# Altium PCB gitarukuran dah bener jadi.PCBDOC
Units mil, origin at the board's own origin, x right, y up, seen from the top; angles counter-clockwise.
Board outline 9670 x 5425 mil, 2 copper layers (Top Layer, Bottom Layer); 62 components, 44 nets, 204 pads, 0 vias.
Unrouted connection lines stored in the file: 147.
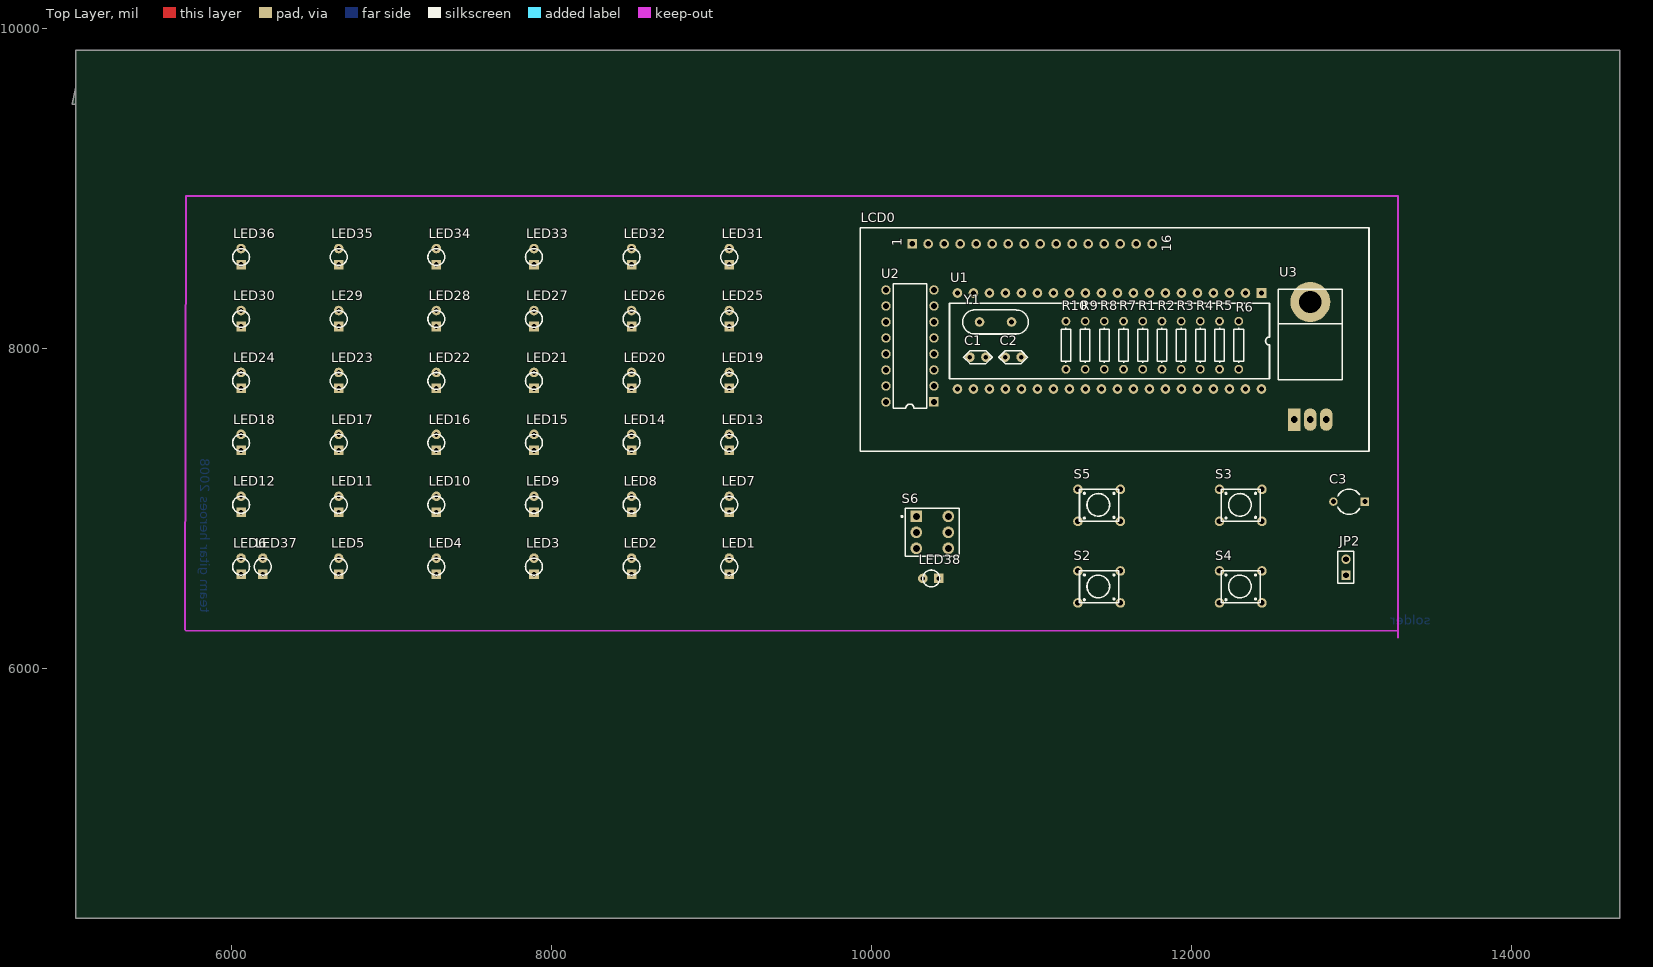
[diagram p0: Top Layer view]
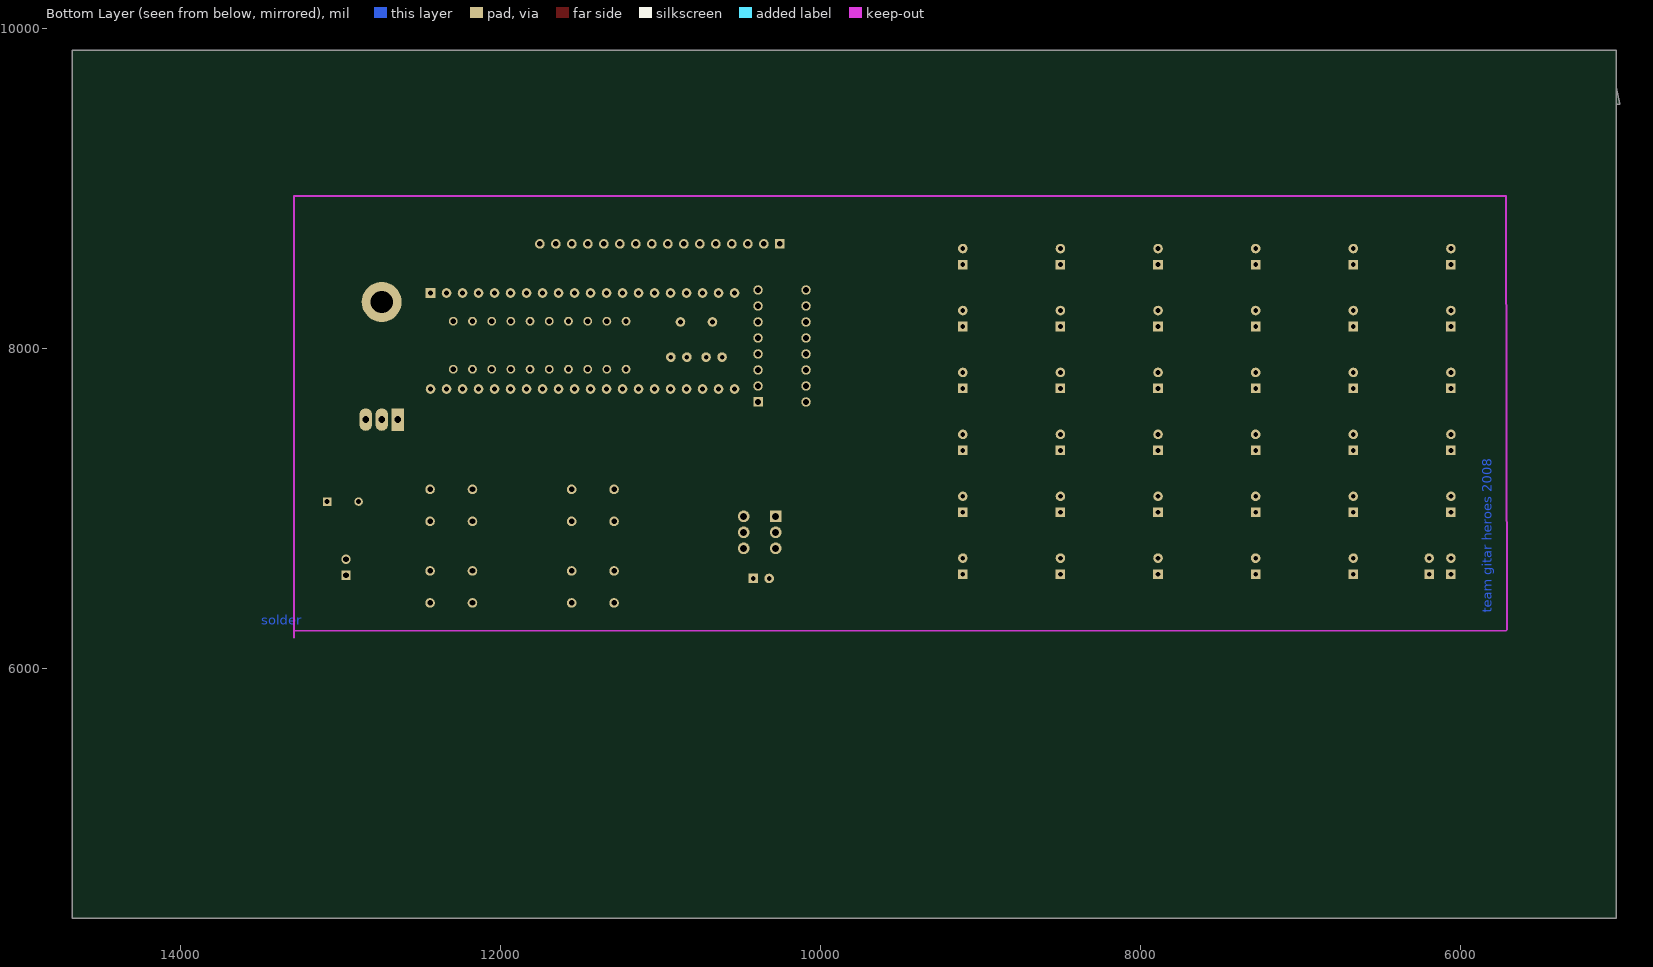
[diagram p1: Bottom Layer view, seen from below]

## Layer stack, top to bottom
Top Layer: signal copper 1.4
Dielectric: dielectric 12.6, FR-4, Dk 4.8
Bottom Layer: signal copper 1.4

## Board outline
5025,9630 5025,4435 14675,4435 14675,9860 5025,9860 5025,9525 5005,9525

## Design rules (kind name [scope] priority, off if disabled: settings)
Clearance [All] p1: gap=10
ComponentClearance [All] p1: gap=10 collisioncheckmode=0
PolygonConnect [All] p1: connectstyle=Relief reliefconductorwidth=10 reliefentries=4 polygonreliefangle="90 Angle"
RoutingLayers [All] p1: top layer="Not Used" bottom layer="Not Used"
RoutingVias [All] p1: holewidth=28 width=50 viastyle="Through Hole" minholewidth=28 minwidth=50 maxholewidth=28 maxwidth=50
SolderMaskExpansion [All] p1: expansion=4
TestPointUsage [All] p1: valid=0 allowmultiple=FALSE
Testpoint [All] p1: side=15 testpointundercomponent=TRUE minsize=40 maxsize=100 preferedsize=60 minholesize=0 maxholesize=40 preferedholesize=32 testpointgrid=1 style=1023 order=1234567890
Width [All] p1: maxlimit=10 minlimit=10 preferedwidth=10
16 further rules are at their usual default settings.

## Components (designator, comment, footprint, x,y, rotation, side; value= is the part's Value field where it differs from the comment)
C1 "cap 33pF" "cap 22/33uF" 11014.63,7942.72 r180 top
C2 "cap 33pF" "cap 22/33uF" 11234.63,7942.72 r180 top
C3 "Cap2" CAPR5-4X5 12985.02,7039.84 r180 top
JP2 "Header 2" HDR1X2 12965.02,6579.84 r90 top
LCD0 "LCD 16X2" "LCD 16X2" 12854.63,10807.72 r90 top
LE29 "LED kecil" "LED kecil" 6569.39,8234.27 r90 top
LED1 "LED kecil" "LED kecil" 9010.08,6686.3 r90 top
LED2 "LED kecil" "LED kecil" 8399.91,6686.3 r90 top
LED3 "LED kecil" "LED kecil" 7789.73,6686.3 r90 top
LED4 "LED kecil" "LED kecil" 7179.56,6686.3 r90 top
LED5 "LED kecil" "LED kecil" 6569.39,6686.3 r90 top
LED6 "LED kecil" "LED kecil" 5959.21,6686.3 r90 top
LED7 "LED kecil" "LED kecil" 9010.08,7073.29 r90 top
LED8 "LED kecil" "LED kecil" 8399.91,7073.29 r90 top
LED9 "LED kecil" "LED kecil" 7789.73,7073.29 r90 top
LED10 "LED kecil" "LED kecil" 7179.56,7073.29 r90 top
LED11 "LED kecil" "LED kecil" 6569.39,7073.29 r90 top
LED12 "LED kecil" "LED kecil" 5959.21,7073.29 r90 top
LED13 "LED kecil" "LED kecil" 9010.08,7460.28 r90 top
LED14 "LED kecil" "LED kecil" 8399.91,7460.28 r90 top
LED15 "LED kecil" "LED kecil" 7789.73,7460.28 r90 top
LED16 "LED kecil" "LED kecil" 7179.56,7460.28 r90 top
LED17 "LED kecil" "LED kecil" 6569.39,7460.28 r90 top
LED18 "LED kecil" "LED kecil" 5959.21,7460.28 r90 top
LED19 "LED kecil" "LED kecil" 9010.08,7847.28 r90 top
LED20 "LED kecil" "LED kecil" 8399.91,7847.28 r90 top
LED21 "LED kecil" "LED kecil" 7789.73,7847.28 r90 top
LED22 "LED kecil" "LED kecil" 7179.56,7847.28 r90 top
LED23 "LED kecil" "LED kecil" 6569.39,7847.28 r90 top
LED24 "LED kecil" "LED kecil" 5959.21,7847.28 r90 top
LED25 "LED kecil" "LED kecil" 9010.08,8234.27 r90 top
LED26 "LED kecil" "LED kecil" 8399.91,8234.27 r90 top
LED27 "LED kecil" "LED kecil" 7789.73,8234.27 r90 top
LED28 "LED kecil" "LED kecil" 7179.56,8234.27 r90 top
LED30 "LED kecil" "LED kecil" 5959.21,8234.27 r90 top
LED31 "LED kecil" "LED kecil" 9010.08,8621.26 r90 top
LED32 "LED kecil" "LED kecil" 8399.91,8621.26 r90 top
LED33 "LED kecil" "LED kecil" 7789.73,8621.26 r90 top
LED34 "LED kecil" "LED kecil" 7179.56,8621.26 r90 top
LED35 "LED kecil" "LED kecil" 6569.39,8621.26 r90 top
LED36 "LED kecil" "LED kecil" 5959.21,8621.26 r90 top
LED37 "LED kecil" "LED kecil" 6094.89,6686.3 r90 top
LED38 "LED kecil" "LED kecil" 10320,6460 r180 top
R1 "Res1" AXIAL-0.3 11694.63,8017.72 r270 top
R2 "Res1" AXIAL-0.3 11814.63,8017.72 r270 top
R3 "Res1" AXIAL-0.3 11934.63,8017.72 r270 top
R4 "Res1" AXIAL-0.3 12054.63,8017.72 r270 top
R5 "Res1" AXIAL-0.3 12174.63,8017.72 r270 top
R6 "Res1" AXIAL-0.3 12294.63,8017.72 r270 top
R7 "Res1" AXIAL-0.3 11574.63,8017.72 r270 top
R8 "Res1" AXIAL-0.3 11454.63,8017.72 r270 top
R9 "Res1" AXIAL-0.3 11334.63,8017.72 r270 top
R10 "Res1" AXIAL-0.3 11214.63,8017.72 r270 top
S2 "pushbutton" pushbutton 11854.63,6507.72 r0 top
S3 "pushbutton" pushbutton 12739.63,7017.72 r0 top
S4 "pushbutton" pushbutton 12739.63,6507.72 r0 top
S5 "pushbutton" pushbutton 11854.63,7017.72 r0 top
S6 "SW-DPDT" DPDT-6 10379.63,6847.72 r0 top
U1 "8051" "8051 40 pin" 10734.63,6597.72 r270 top
U2 "ULN2003A" A16 10239.63,8012.72 r90 top
U3 "7805" 78XX/79XX 12259.63,7792.72 r90 top
Y1 "XTAL" XTAL 10774.63,8062.72 r0 top

## Footprints (in the part's own frame and the unit in brackets; to place one, negate y for a bottom-side part, rotate by r counter-clockwise, add the part's x,y. Pads: shape width x height; smd on the part's side, far side on the other; paste and mask are expansions set on the pad)
78XX/79XX [mil]
  round 250 hole 140: 0(495,-482)
  rect 140x80 hole 42: 1(-240,-382)
  oval 140x80 hole 42: 2(-240,-482) 3(-240,-582)
  silkscreen extent 10,-682 575,-282
"8051 40 pin" [mil]
  rect 60x60 hole 33: 1(-1746,1702)
  round 60 hole 33: 2(-1746,1602) 3(-1746,1502) 4(-1746,1402) 5(-1746,1302) 6(-1746,1202) 7(-1746,1102) 8(-1746,1002) 9(-1746,902) 10(-1746,802) 11(-1746,702) 12(-1746,602) 13(-1746,502) 14(-1746,402) 15(-1746,302) 16(-1746,202) 17(-1746,102) 18(-1746,2) 19(-1746,-98) 20(-1746,-198) 21(-1146,-198) 22(-1146,-98) 23(-1146,2) 24(-1146,102) 25(-1146,202) 26(-1146,302) 27(-1146,402) 28(-1146,502) 29(-1146,602) 30(-1146,702) 31(-1146,802) 32(-1146,902) 33(-1146,1002) 34(-1146,1102) 35(-1146,1202) 36(-1146,1302) 37(-1146,1402) 38(-1146,1502) 39(-1146,1602) 40(-1146,1702)
  silkscreen extent -1681,-248 -1211,1752
A16 [mm] "DIP; 16 Leads; Row Spacing 7.62 mm; Pitch 2.54 mm"
  rect 1.5x1.5 hole 0.9: 1(-8.89,-3.81)
  round 1.5 hole 0.9: 2(-6.35,-3.81) 3(-3.81,-3.81) 4(-1.27,-3.81) 5(1.27,-3.81) 6(3.81,-3.81) 7(6.35,-3.81) 8(8.89,-3.81) 9(8.89,3.81) 10(6.35,3.81) 11(3.81,3.81) 12(1.27,3.81) 13(-1.27,3.81) 14(-3.81,3.81) 15(-6.35,3.81) 16(-8.89,3.81)
  silkscreen extent -9.85,-2.65 9.85,2.65
AXIAL-0.3 [mm]
  round 1.4 hole 0.85: 1(-3.81,0) 2(3.81,0)
  silkscreen extent -2.77,-0.76 2.77,0.76
"cap 22/33uF" [mil]
  round 60 hole 28: 1(300,0) 2(400,0)
  silkscreen extent 260,-40 440,40
CAPR5-4X5 [mm]
  rect 1.35x1.35 hole 0.8: 1(-2.5,0)
  round 1.35 hole 0.8: 2(2.5,0)
  silkscreen extent -1.69,-2 1.82,2
DPDT-6 [mm]
  rect 1.85x1.85 hole 1.1: 1(-2.54,2.54)
  round 1.85 hole 1.1: 2(-2.54,0) 3(-2.54,-2.54) 4(2.54,-2.54) 5(2.54,0) 6(2.54,2.54)
  silkscreen extent -4.96,-3.81 4.28,3.81
HDR1X2 [mm] "Connector; Header; 2 Position"
  rect 1.5x1.5 hole 0.9: 1(0,0)
  round 1.5 hole 0.9: 2(2.54,0)
  silkscreen extent -1.27,-1.27 3.81,1.27
"LCD 16X2" [mil]
  rect 60x60 hole 35: 1(-2157,2601)
  round 60 hole 35: 2(-2157,2501) 3(-2157,2401) 4(-2157,2301) 5(-2157,2201) 6(-2157,2101) 7(-2157,2001) 8(-2157,1901) 9(-2157,1801) 10(-2157,1701) 11(-2157,1601) 12(-2157,1501) 13(-2157,1401) 14(-2157,1301) 15(-2157,1201) 16(-2157,1101)
  silkscreen extent -3452,-254 -2057,2926
"LED kecil" [mil]
  rect 60x60 hole 30: 1(-100,-100)
  round 60 hole 30: 2(0,-100)
  silkscreen extent -106,-153 0,-47
pushbutton [mil]
  round 60 hole 35: 1(-565,-101) 1(-300,-101) 2(-565,99) 2(-300,99)
  silkscreen extent -555,-101 -310,99
XTAL [mil]
  round 60 hole 30: 1(-100,100) 2(100,100)
  silkscreen extent -205,25 205,175

## Part data
C1 C2: library part "cap 22/33uF"
C3: "Capacitor"
JP2: "Header, 2-Pin"
R1 R2 R3 R4 R5 R6 R7 R8 R9 R10: "Resistor"
S6: "Double-Pole, Double-Throw Switch"
U1: library part "8051 40 pin"
U2: "High-Voltage, High-Current Darlington Array"
U3: library part 7805/7809/7812/7905/7909/7912

## Nets (pads, with @x,y where several pads share a name; then routed paths per layer and width w, separated by ;. In a path a pad name is that pad's centre, name@x,y a point inside that pad or via, vN(x,y) a via of type N, cw(c..) or ccw(c..) an arc to the next point about the centre after c; other vN are vias at no path point)
10: LCD0.7 U1.1
11: LCD0.8 U1.2
12: LCD0.9 U1.3
13: LCD0.10 U1.4
14: LCD0.11 U1.5
15: LCD0.12 U1.6
16: LCD0.13 U1.7
17: LCD0.14 U1.8
30: LCD0.4 U1.10
31: LCD0.6 U1.11
32: U1.12
33: S2.2 U1.13
34: S3.2 U1.14
35: S4.2 U1.15
36: S5.2 U1.16
37: R10.1 U1.17
B1: R6.2 U1.39 U2.1
B2: R5.2 U1.38 U2.2
B3: R4.2 U1.37 U2.3
B4: R3.2 U1.36 U2.4
B5: R2.2 U1.35 U2.5
B6: R1.2 U1.34 U2.6
G1: LED1.2 LED7.2 LED13.2 LED19.2 LED25.2 LED31.2 U2.16
G2: LED2.2 LED8.2 LED14.2 LED20.2 LED26.2 LED32.2 U2.15
G3: LED3.2 LED9.2 LED15.2 LED21.2 LED27.2 LED33.2 U2.14
G4: LED4.2 LED10.2 LED16.2 LED22.2 LED28.2 LED34.2 U2.13
G5: LE29.2 LED5.2 LED11.2 LED17.2 LED23.2 LED35.2 U2.12
G6: LED6.2 LED12.2 LED18.2 LED24.2 LED30.2 LED36.2 U2.11
GND: C1.2 C2.2 JP2.1 LCD0.1 LCD0.5 LCD0.16 R7.1 R8.2 R9.2 S2.1 S3.1 S4.1 S5.1 U1.20 U2.8 U3.2
NetC1_1: C1.1 U1.19 Y1.1
NetC2_1: C2.1 U1.18 Y1.2
NetC3_2: C3.2 R8.1 U1.9
NetJP2_2: JP2.2 S6.3
NetLCD0_3: LCD0.3 R9.1
NetLED37_2: LED37.2 R10.2
NetLED38_2: LED38.2 R7.2
NetS6_1: S6.1 U3.1
R1: LED1.1 LED2.1 LED3.1 LED4.1 LED5.1 LED6.1 U1.21
R2: LED7.1 LED8.1 LED9.1 LED10.1 LED11.1 LED12.1 U1.22
R3: LED13.1 LED14.1 LED15.1 LED16.1 LED17.1 LED18.1 U1.23
R4: LED19.1 LED20.1 LED21.1 LED22.1 LED23.1 LED24.1 U1.24
R5: LE29.1 LED25.1 LED26.1 LED27.1 LED28.1 LED30.1 U1.25
R6: LED31.1 LED32.1 LED33.1 LED34.1 LED35.1 LED36.1 U1.26
VCC: C3.1 LCD0.2 LCD0.15 LED37.1 LED38.1 R1.1 R2.1 R3.1 R4.1 R5.1 R6.1 U1.31 U1.40 U2.9 U3.3
pads on no net: S6.2 S6.4 S6.5 S6.6 U1.27 U1.28 U1.29 U1.30 U1.32 U1.33 U2.7 U2.10 U3.0

## Keep-outs
Keep-Out Layer:
  lines w10: 5708.66,6240.16 5715,8950 13290.04,8950 13290.04,6190 ; 5715,6233.46 13290.04,6233.46

## Other copper
Bottom Layer:
  text "team gitar heroes 2008" at 5805,6345 h60 r270
  text "solder" at 13495,6270 h60

## Dimensions
13098.41,8707.24 to 13295.26,8707.24 on Top Layer
12903.39,8759.84 to 12903.39,8956.69 on Top Layer
5944.88,8950.15 to 5984.25,8556.45 on Top Layer
5711.5,8799.21 to 13309.93,8996.06 on Top Layer
5669.29,8945.15 to 5708.66,6228.62 on Top Layer
5964.57,8562.99 to 6122.05,6633.86 on Top Layer
6051.45,8582.68 to 9122.32,8523.62 on Top Layer
6043.31,8169.29 to 6043.31,8562.99 on Top Layer
6062.99,8562.99 to 6692.91,8562.99 on Top Layer

## Text inside footprints (layer, text, board x,y; h text height)
LCD0: Top Overlay "16" at 11873.63,8600.72 h60 r90; Top Overlay "1" at 10188.63,8635.72 h60 r90